# EAGLE board ChromDot_Ring (EAGLE 9.1.0)
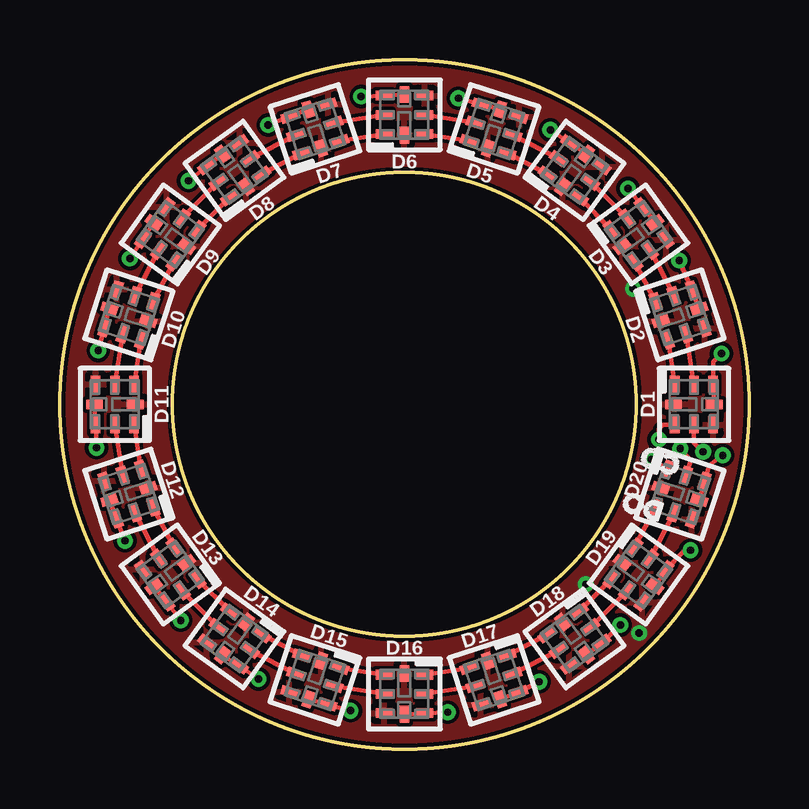
[diagram p0: board, top side]
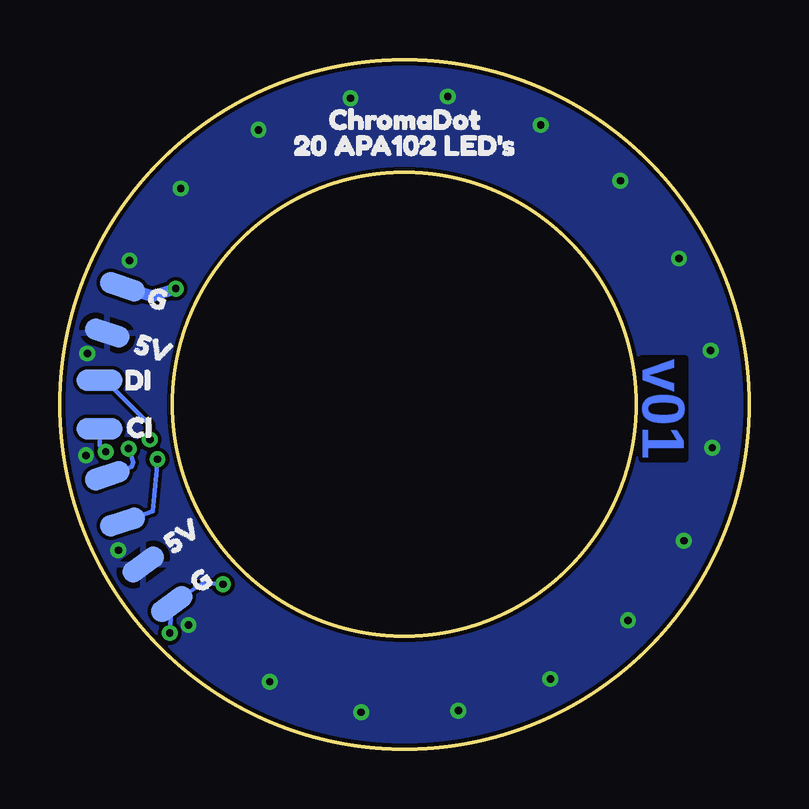
[diagram p1: board, bottom side, seen from below]

Size 28.7 x 28.7 mm. Coordinates in mm from the lower left corner, seen from the top.
Outline: circle at 14.35,14.35 radius 14.35
Outline: circle at 14.35,14.35 radius 9.65
Copper layers (1*16): Top 0.035mm / dielectric 1.5mm / Bottom 0.035mm
Design rules "SparkFun-2-layer-PCBWay-LIMIT": minimum track width 6mil, minimum drill 0.3mm, track to track 6mil, track to pad 6mil, pad to pad 6mil, via to via 6mil, smd to smd 6mil, copper to edge 6mil, drill to drill 6mil, minimum pad ring 7mil, minimum via ring 7mil, stop-mask expansion 4mil, vias tented up to drill 25mil, thermal gap 10mil

## Footprints (pad centres in the part's own frame; a part is rotated, then mirrored left to right if it is on the bottom)
APA102-2020 = smd 0.7 x 0.4: CKI -0.85,0; CKO 0.85,0; GND -0.85,-0.8; SDI -0.85,0.8; SDO 0.85,0.8; VDD 0.85,-0.8 | smd 0.4 x 0.7: GNDPAD 0,0.85; VDDPAD 0,-0.85
DOUBLELEDPAD = smd 0.889 x 1.905: P$1 -1.016,0; P$2 1.016,0

## Placement (x,y rotation side)
D1  APA1022020  [APA102-2020]  26.42,14.35 90 top
D2  APA1022020  [APA102-2020]  25.83,18.08 108 top
D3  APA1022020  [APA102-2020]  24.1,21.44 126 top
D4  APA1022020  [APA102-2020]  21.44,24.1 144 top
D5  APA1022020  [APA102-2020]  18.08,25.83 162 top
D6  APA1022020  [APA102-2020]  14.35,26.42 180 top
D7  APA1022020  [APA102-2020]  10.62,25.83 198 top
D8  APA1022020  [APA102-2020]  7.26,24.1 216 top
D9  APA1022020  [APA102-2020]  4.6,21.44 234 top
D10  APA1022020  [APA102-2020]  2.87,18.08 252 top
D11  APA1022020  [APA102-2020]  2.29,14.35 270 top
D12  APA1022020  [APA102-2020]  2.87,10.62 288 top
D13  APA1022020  [APA102-2020]  4.6,7.26 306 top
D14  APA1022020  [APA102-2020]  7.26,4.6 324 top
D15  APA1022020  [APA102-2020]  10.62,2.87 342 top
D16  APA1022020  [APA102-2020]  14.35,2.29 0 top
D17  APA1022020  [APA102-2020]  18.08,2.87 18 top
D18  APA1022020  [APA102-2020]  21.44,4.6 36 top
D19  APA1022020  [APA102-2020]  24.1,7.26 54 top
D20  APA1022020  [APA102-2020]  25.83,10.62 72 top
FRAME1  FRAME-LETTER  [CREATIVE_COMMONS]  -80.9,0.38 0 top  (outside the outline)
J1  DOUBLE_LED_PAD  [DOUBLELEDPAD]  26.42,18.29 252 bottom
J2  DOUBLE_LED_PAD  [DOUBLELEDPAD]  27.05,14.35 270 bottom
J3  DOUBLE_LED_PAD  [DOUBLELEDPAD]  24.64,6.86 126 bottom
J4  DOUBLE_LED_PAD  [DOUBLELEDPAD]  26.42,10.41 108 bottom
U$1  [CHROMADOT5]  18.22,26.23 0 bottom
U$2  [20_APA102_LED#S6]  19.69,25.15 0 bottom
U$3  [5V6]  24.83,8 36 bottom
U$4  [5V6]  26.23,17.14 342 bottom
U$5  [G4]  25.72,19.11 342 bottom
U$6  [G4]  23.75,6.35 36 bottom
U$7  [DO3]  25.78,9.59 162 top
U$8  [CO1]  26.48,11.49 162 top
U$9  [CI6]  26.67,13.4 0 bottom
U$10  [DI4]  26.73,15.37 0 bottom

## Library data of the parts
D1-D20 = SparkFun-LED; PROD_ID: DIO-13883
FRAME1 = SparkFun-Aesthetics
J1-J4 = Andy
U$1 U$2 = buzzard_labels (22)
U$3-U$8 = buzzard_labels (25)
U$9 U$10 = buzzard_labels (26)

## Nets
5V: D1.VDD D1.VDDPAD D2.VDD D2.VDDPAD D3.VDD D3.VDDPAD D4.VDD D4.VDDPAD D5.VDD D5.VDDPAD D6.VDD D6.VDDPAD D7.VDD D7.VDDPAD D8.VDD D8.VDDPAD D9.VDD D9.VDDPAD D10.VDD D10.VDDPAD D11.VDD D11.VDDPAD D12.VDD D12.VDDPAD D13.VDD D13.VDDPAD D14.VDD D14.VDDPAD D15.VDD D15.VDDPAD D16.VDD D16.VDDPAD D17.VDD D17.VDDPAD D18.VDD D18.VDDPAD D19.VDD D19.VDDPAD D20.VDD D20.VDDPAD J1.P$2 J3.P$2
GND: D1.GND D1.GNDPAD D2.GND D2.GNDPAD D3.GND D3.GNDPAD D4.GND D4.GNDPAD D5.GND D5.GNDPAD D6.GND D6.GNDPAD D7.GND D7.GNDPAD D8.GND D8.GNDPAD D9.GND D9.GNDPAD D10.GND D10.GNDPAD D11.GND D11.GNDPAD D12.GND D12.GNDPAD D13.GND D13.GNDPAD D14.GND D14.GNDPAD D15.GND D15.GNDPAD D16.GND D16.GNDPAD D17.GND D17.GNDPAD D18.GND D18.GNDPAD D19.GND D19.GNDPAD D20.GND D20.GNDPAD J1.P$1 J3.P$1
N$1: D4.CKO D5.CKI
N$2: D1.CKI J2.P$2
N$3: D1.SDI J2.P$1
N$4: D1.CKO D2.CKI
N$5: D1.SDO D2.SDI
N$6: D2.CKO D3.CKI
N$7: D2.SDO D3.SDI
N$8: D3.CKO D4.CKI
N$9: D3.SDO D4.SDI
N$10: D4.SDO D5.SDI
N$11: D5.CKO D6.CKI
N$12: D5.SDO D6.SDI
N$13: D6.CKO D7.CKI
N$14: D6.SDO D7.SDI
N$15: D7.CKO D8.CKI
N$16: D7.SDO D8.SDI
N$17: D8.CKO D9.CKI
N$18: D8.SDO D9.SDI
N$19: D9.CKO D10.CKI
N$20: D9.SDO D10.SDI
N$21: D10.CKO D11.CKI
N$22: D10.SDO D11.SDI
N$23: D11.CKO D12.CKI
N$24: D11.SDO D12.SDI
N$25: D12.CKO D13.CKI
N$26: D12.SDO D13.SDI
N$27: D13.CKO D14.CKI
N$28: D13.SDO D14.SDI
N$29: D14.CKO D15.CKI
N$30: D14.SDO D15.SDI
N$31: D15.CKO D16.CKI
N$32: D15.SDO D16.SDI
N$33: D16.CKO D17.CKI
N$34: D16.SDO D17.SDI
N$35: D17.CKO D18.CKI
N$36: D17.SDO D18.SDI
N$37: D18.CKO D19.CKI
N$38: D18.SDO D19.SDI
N$39: D19.CKO D20.CKI
N$40: D19.SDO D20.SDI
N$41: D20.CKO J4.P$2
N$42: D20.SDO J4.P$1

## Tracks (layer width: path | path; a pad name or v marks a point on that pad's centre or on a via)
5V  (via drill 0.3)
  Top 0.178: 26.03,8.27 26,8.23 D19.VDD D19.VDDPAD | 26.03,8.27 v26.27,8.27 | v27.62,12.23 27.05,11.81 D20.VDD D20.VDDPAD | v27.56,16.47 27.22,16.13 D1.VDD D1.VDDPAD | v26.27,8.27 26.03,8.27 | v25.8,20.35 D2.VDD D2.VDDPAD | D3.VDDPAD D3.VDD v23.67,23.35 | v20.43,25.79 D4.VDD D4.VDDPAD | v16.6,27.11 D5.VDD D5.VDDPAD | D6.VDDPAD D6.VDD v12.55,27.18 | v8.67,25.99 D7.VDD D7.VDDPAD | v5.35,23.67 D8.VDD D8.VDDPAD | D9.VDDPAD D9.VDD v2.91,20.43 | v1.59,16.6 D10.VDD D10.VDDPAD | v1.52,12.55 D11.VDD D11.VDDPAD | D12.VDDPAD D12.VDD v2.71,8.67 | D13.VDDPAD D13.VDD v5.03,5.35 | D14.VDDPAD D14.VDD v8.27,2.91 | D15.VDDPAD D15.VDD v12.1,1.59 | D16.VDDPAD D16.VDD v16.15,1.52 | v19.96,2.79 D17.VDD D17.VDDPAD | D18.VDDPAD D18.VDD v23.35,5.16
  pour Bottom: 14.41,28.7 arc-90 28.73,14.38 arc-90 14.35,0 arc-90 0.03,14.32 arc-90
GND  (via drill 0.3)
  Bottom 0.178: v24.13,4.83 J3.P$1 22.73,6.92 v21.91,6.86
  Bottom 0.508: v23.88,19.18 24.83,18.86 J1.P$1
  pour Top: 14.35,28.7 arc90 0,14.35 arc90 14.35,0 arc90 28.7,14.35 arc90
N$1
  Top 0.178: D4.CKO D5.CKI
N$2  (via drill 0.3)
  Top 0.178: v26.8,12.38 26.42,12.76 D1.CKI
  Bottom 0.178: J2.P$2 27.05,12.64 v26.8,12.38
N$3  (via drill 0.3)
  Top 0.178: 25.59,13.48 D1.SDI 25.12,13.5 24.96,13.34 v24.96,12.89
  Bottom 0.178: v24.96,12.89 24.96,13.5 26.91,15.45 26.97,15.45 J2.P$1
N$4
  Top 0.178: D2.CKI D1.CKO
N$5
  Top 0.178: D1.SDO D2.SDI
N$6
  Top 0.178: D3.CKI D2.CKO
N$7
  Top 0.178: D2.SDO D3.SDI
N$8
  Top 0.178: D3.CKO D4.CKI
N$9
  Top 0.178: D4.SDI D3.SDO
N$10
  Top 0.178: D5.SDI D4.SDO
N$11
  Top 0.178: D6.CKI D5.CKO
N$12
  Top 0.178: D5.SDO D6.SDI
N$13
  Top 0.178: D6.CKO D7.CKI
N$14
  Top 0.178: D7.SDI D6.SDO
N$15
  Top 0.178: D7.CKO D8.CKI
N$16
  Top 0.178: D8.SDI D7.SDO
N$17
  Top 0.178: D8.CKO D9.CKI
N$18
  Top 0.178: D9.SDI D8.SDO
N$19
  Top 0.178: D9.CKO D10.CKI
N$20
  Top 0.178: D10.SDI D9.SDO
N$21
  Top 0.178: D10.CKO D11.CKI
N$22
  Top 0.178: D11.SDI D10.SDO
N$23
  Top 0.178: D12.CKI D11.CKO
N$24
  Top 0.178: D11.SDO D12.SDI
N$25
  Top 0.178: D12.CKO D13.CKI
N$26
  Top 0.178: D12.SDO D13.SDI
N$27
  Top 0.178: D14.CKI D13.CKO
N$28
  Top 0.178: D13.SDO D14.SDI
N$29
  Top 0.178: D14.CKO D15.CKI
N$30
  Top 0.178: D15.SDI D14.SDO
N$31
  Top 0.178: D15.CKO D16.CKI
N$32
  Top 0.178: D16.SDI D15.SDO
N$33
  Top 0.178: D16.CKO D17.CKI
N$34
  Top 0.178: D17.SDI D16.SDO
N$35
  Top 0.178: D18.CKI D17.CKO
N$36
  Top 0.178: D17.SDO D18.SDI
N$37
  Top 0.178: D19.CKI D18.CKO
N$38
  Top 0.178: D19.SDI D18.SDO
N$39
  Top 0.178: D20.CKI D19.CKO
N$40
  Top 0.178: D19.SDO D20.SDI
N$41  (via drill 0.3)
  Top 0.178: D20.CKO 26.29,12 v25.84,12.51
  Bottom 0.178: v25.84,12.51 25.65,11.94 25.72,11.75 J4.P$2
N$42  (via drill 0.3)
  Top 0.178: D20.SDO v24.64,12.07
  Bottom 0.178: J4.P$1 24.83,9.91 v24.64,12.07

## Text on the board
Bottom: v01